# Altium PCB E-27 Line Sensor.PcbDoc
Units mil, origin at the board's own origin, x right, y up, seen from the top; angles counter-clockwise.
Board outline 1704 x 1704 mil, 2 copper layers (Top Layer, Bottom Layer); 18 components, 15 nets, 72 pads, 9 vias.
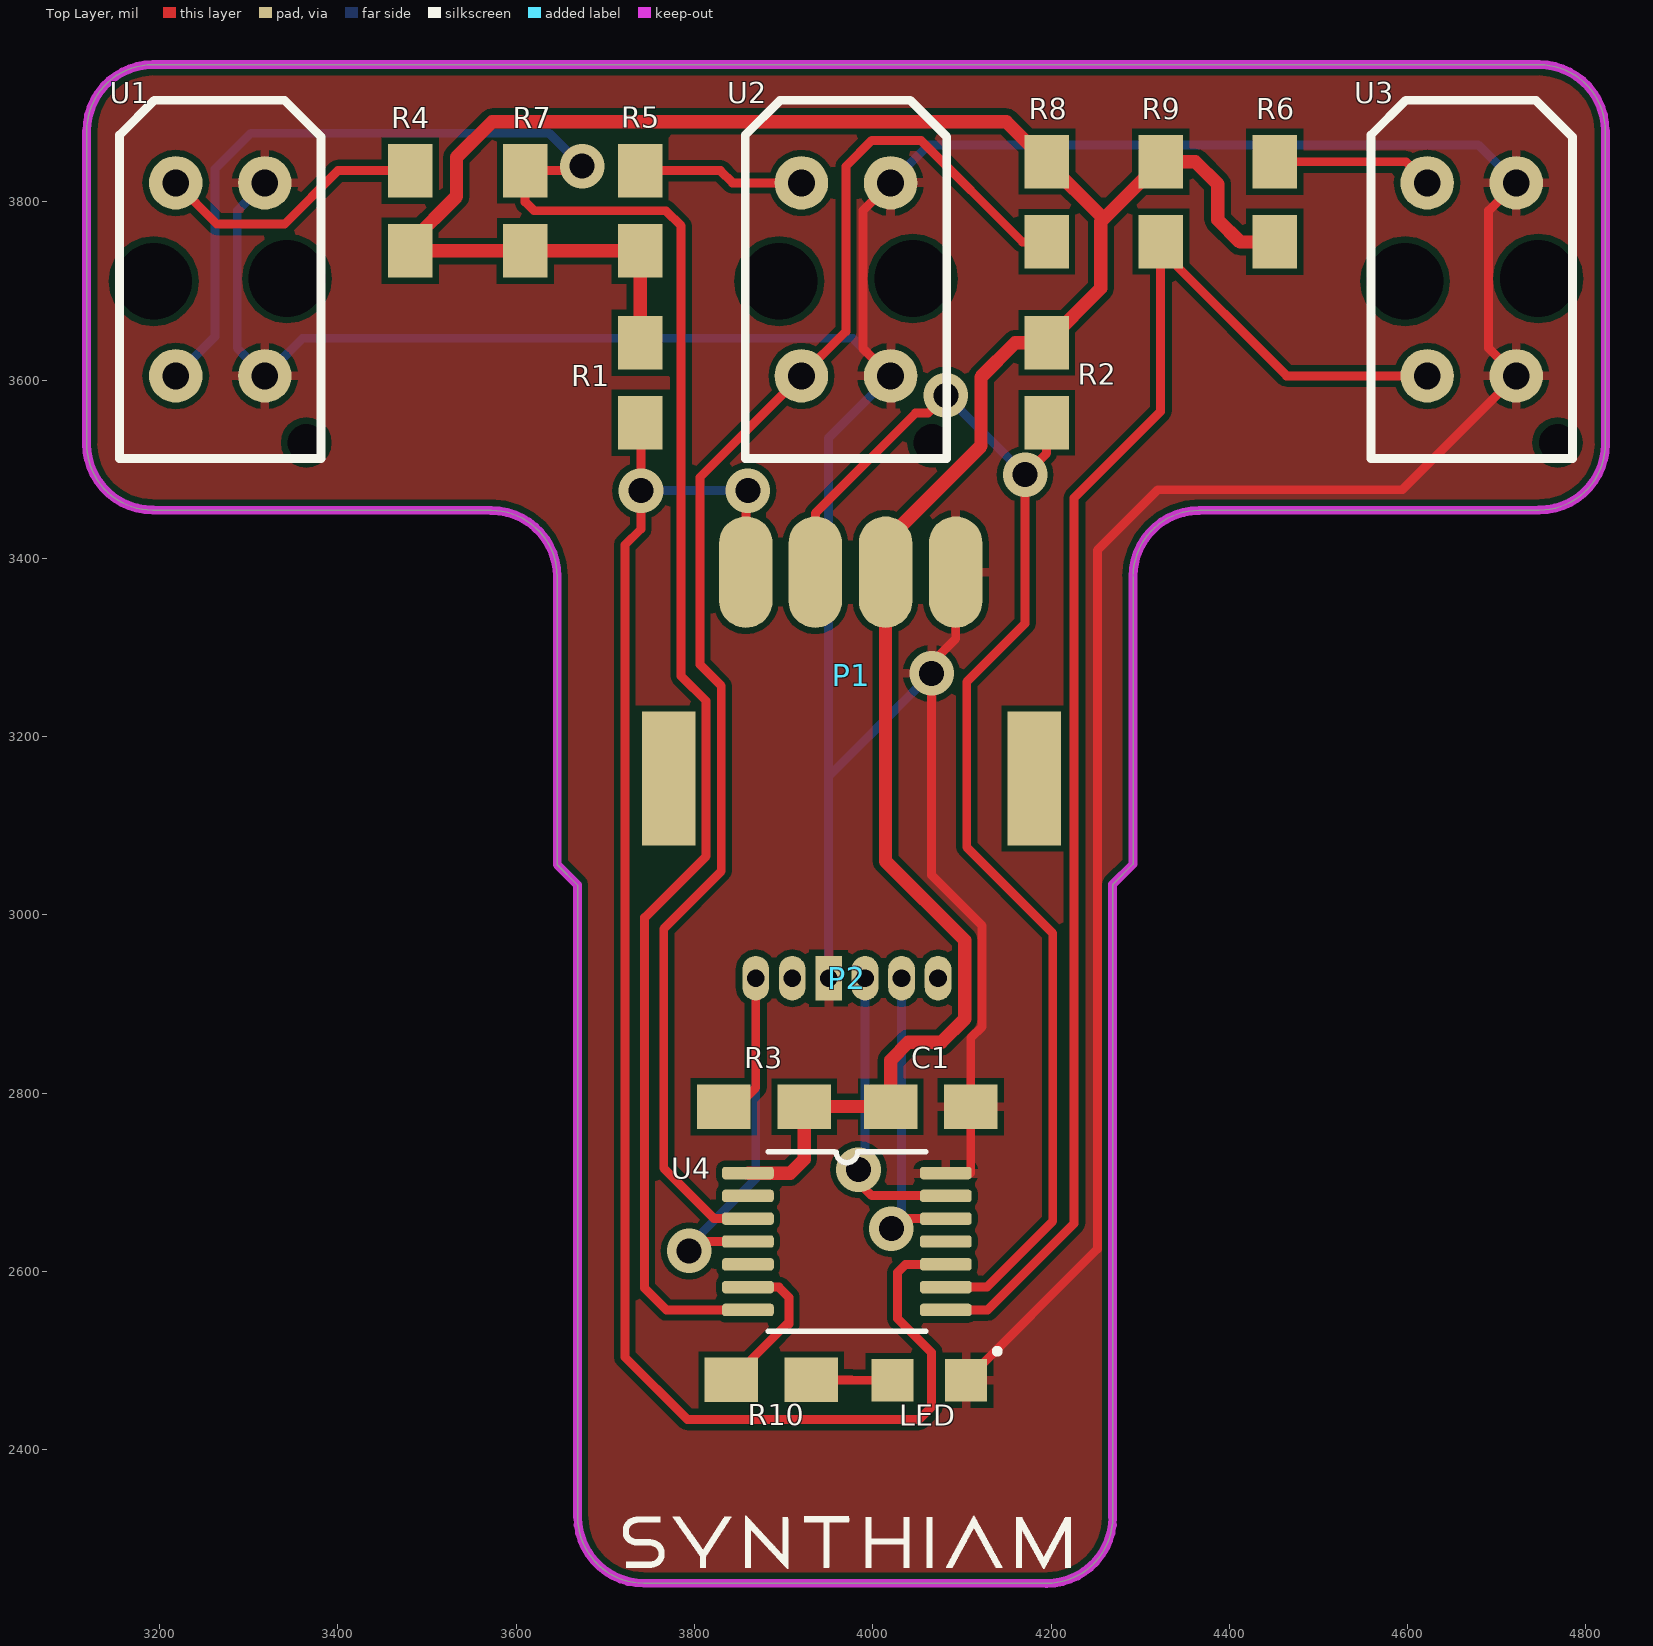
[diagram p0: Top Layer view]
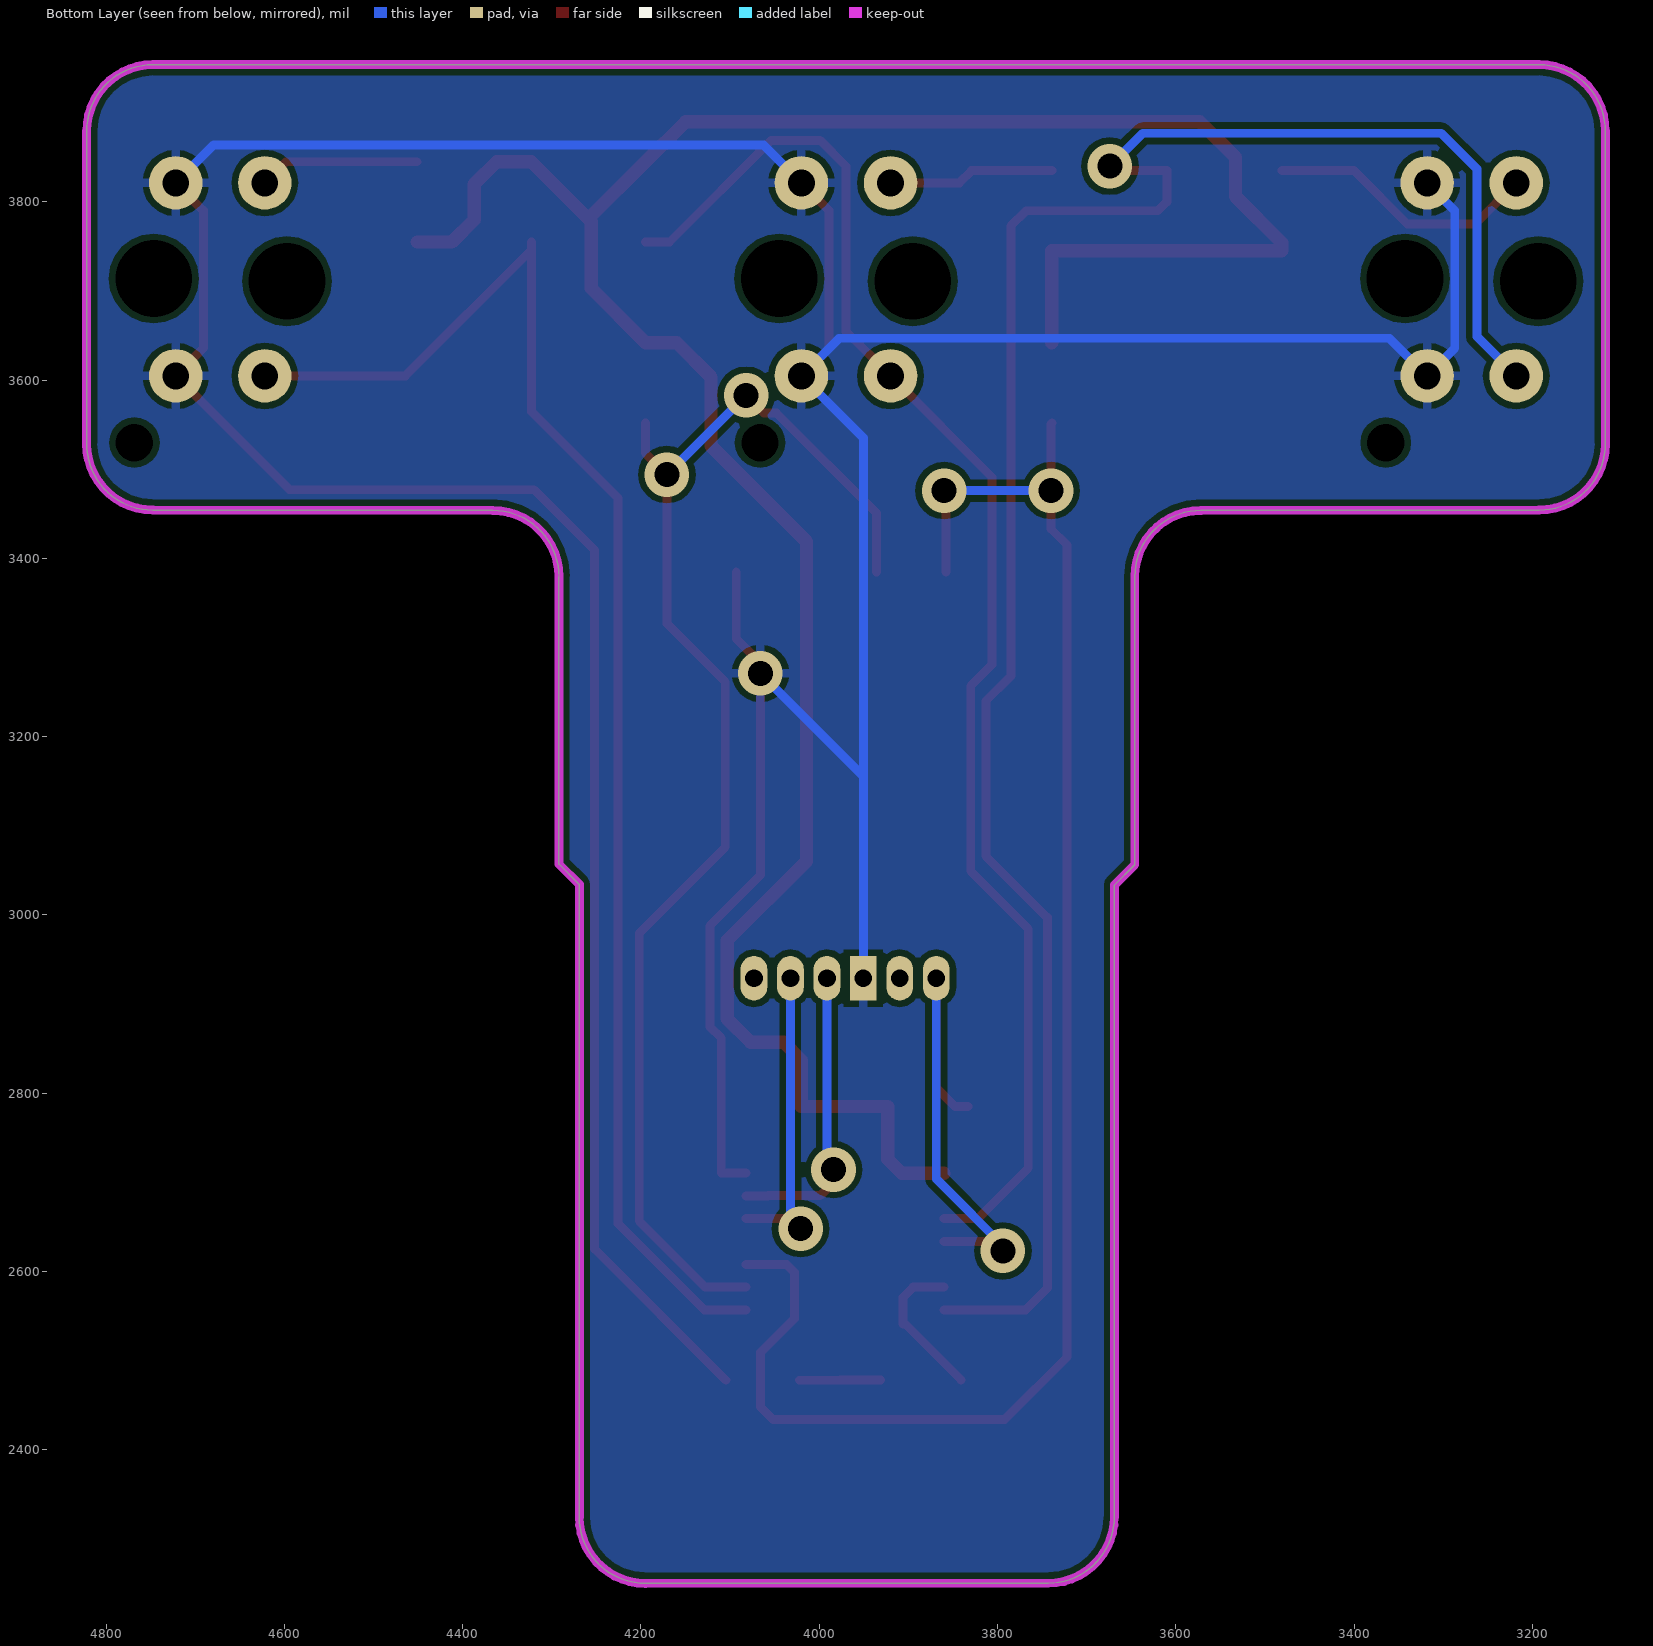
[diagram p1: Bottom Layer view, seen from below]

## Layer stack, top to bottom
Top Layer: signal copper 1.4
Dielectric: dielectric 12.6, FR-4, Dk 4.8
Bottom Layer: signal copper 1.4

## Board outline
3646,3056.31 3646,3379.5 ccw(c3571.69,3379.5) 3571.69,3453.81 3571.69,3454 3192.31,3454 3192.31,3454.19 cw(c3192.31,3528.5) 3118,3528.5 3118,3879.69 3118.19,3879.69 cw(c3192.5,3879.69) 3192.5,3954 4747.5,3954 cw(c4747.5,3879.69) 4821.81,3879.69 4822,3879.69 4822,3528.5 cw(c4747.69,3528.5) 4747.69,3454.19 4747.69,3454 4366.31,3454 4366.31,3453.81 ccw(c4366.31,3379.5) 4292,3379.5 4292,3057 4269.19,3034.19 4269.19,2324.31 4269.31,2324.31 cw(c4195,2324.31) 4195,2250 4195,2250.19 3743.31,2250.19 cw(c3743.31,2324.5) 3669,2324.5 3668.81,2324.5 3668.81,3033.5

## Design rules (kind name [scope] priority, off if disabled: settings)
Clearance [All] p1: gap=7
PolygonConnect [All] p1: connectstyle=Relief reliefconductorwidth=10 reliefentries=4 polygonreliefangle="90 Angle"
RoutingVias [All] p1: holewidth=28 width=50 viastyle="Through Hole" minholewidth=28 minwidth=50 maxholewidth=28 maxwidth=50
SMDNeckDown [All] p1: percent=110.000
SilkscreenOverComponentPads [All] p1: minsilkscreentomaskgap=10
SolderMaskExpansion [All] p1: expansion=4
Width Width_1 [InNet('VCC')] p1: maxlimit=20 minlimit=10 preferedwidth=15 minimp=50.000000 maximp=50.000000 favimp=50.000000
Width [All] p2: maxlimit=10 minlimit=10 preferedwidth=10
27 further rules are at their usual default settings.

## Components (designator, comment, footprint, x,y, rotation, side; value= is the part's Value field where it differs from the comment)
C1 "0.1uF" "0805 TIGHT" 4065,2785 r180 top
LED "LED2" "0805 LED - TIGHT" 4091,2477.95 r0 top (schematic designator PWRLED)
P1 "I2C Port" "JST-PH 4-pin SMD" 3975,3383 r180 top
P2 "Program Port" "Mini Prog header" 3971.5,2929 r0 top
R1 "10kohm" "0805 TIGHT" 3739,3597 r270 top
R2 "10kohm" "0805 TIGHT" 4195,3597 r270 top
R3 "Res1" "0805 TIGHT" 3878,2785 r0 top
R4 "10kohm" "0805 TIGHT" 3481,3790 r270 top
R5 "10kohm" "0805 TIGHT" 3739,3790 r90 top
R6 "10kohm" "0805 TIGHT" 4451,3800 r270 top
R7 "10kohm" "0805 TIGHT" 3610,3790 r90 top
R8 "10kohm" "0805 TIGHT" 4195,3800 r270 top
R9 "10kohm" "0805 TIGHT" 4323,3800 r270 top
R10 "Res1" "0805 TIGHT" 3886,2478.38 r180 top
U1 "Reflective Sensor" TCRT5000 3268,3713 r90 top
U2 "Reflective Sensor" TCRT5000 3970,3713 r90 top
U3 "Reflective Sensor" TCRT5000 4672,3713 r90 top
U4 "PIC16F1704-I/ST" TSSOP14 3971.87,2632 r0 top

## Footprints (in the part's own frame and the unit in brackets; to place one, negate y for a bottom-side part, rotate by r counter-clockwise, add the part's x,y. Pads: shape width x height; smd on the part's side, far side on the other; paste and mask are expansions set on the pad)
"0805 LED - TIGHT" [mm] "SMT LED; 2 Flat Leads; Lite-Oon LTST-C170CKT"
  rect 1.2x1.2 smd: 1(-1.75,0) 2(0.35,0)
  silkscreen extent 1.21,0.8 1.26,0.85
"0805 TIGHT" [mil]
  rect 60x50 smd: 1(-45,0) 2(45,0)
"JST-PH 4-pin SMD" [mil]
  rect 60x150 smd: 0(-206,230) 0(204,230)
  oval 60x125 smd: 1(-118.11,-1.64) 2(-39.37,-1.64) 3(39.37,-1.64) 4(117.32,-1.64)
"Mini Prog header" [mil]
  oval 30x50 hole 20: 1(-102.74,0) 2(-61.84,0) 4(19.95,0) 5(60.84,0) 6(101.74,0)
  rect 30x50 hole 20: 3(-20.95,0)
TCRT5000 [mil]
  round 0 hole 42 unplated: 0(-183.07,-96.46)
  round 0 hole 86 unplated: 0(-2,74.8) 0(1,-74.8)
  round 60 hole 30: 1(108.27,50) 2(108.27,-50) 3(-108.27,-50) 4(-108.27,50)
  silkscreen extent -201,-113 201,113
TSSOP14 [mil] "PIC16F1503"
  rrect50% 58x14 smd mask+4: 1(-111.87,78.35) 2(-111.87,52.76) 3(-111.87,27.17) 4(-111.87,1.57) 5(-111.87,-24.02) 6(-111.87,-49.61) 7(-111.87,-75.2) 8(110.13,-75.2) 9(110.13,-49.61) 10(110.13,-24.02) 11(110.13,1.57) 12(110.13,27.17) 13(110.13,52.76) 14(110.13,78.35)
  silkscreen extent -89,-99 88,102

## Part data
C1: library part Cap, "Capacitor"
LED: library part LED1, "Typical RED GaAs LED"
P1: library part "Header 4", "Header, 4-Pin"
P2: library part "Header 6", "Header, 6-Pin"
R1 R2 R4 R5 R6 R7 R8 R9: library part Res1, "Resistor"
R3 R10: "Resistor"
U1 U2 U3: library part Optoisolator1, "4-Pin Phototransistor Optocoupler"
U4: library part PIC16F1503

## Free pads (board coordinates)
  round 225 on Bottom Solder: 0(3971,2491)

## Via types
v1: diameter 50, hole 28, Top Layer to Bottom Layer, tented both sides, 9 vias

## Nets (pads, with @x,y where several pads share a name; then routed paths per layer and width w, separated by ;. In a path a pad name is that pad's centre, name@x,y a point inside that pad or via, vN(x,y) a via of type N, cw(c..) or ccw(c..) an arc to the next point about the centre after c; other vN are vias at no path point)
GND: C1.1 LED.2 P1.1 P2.3 U1.2 U1.3 U2.2 U2.3 U3.2 U3.3 U4.14 | length 5366.3
  Top Layer w10: U2.3 3989,3635.73 3989,3790.27 U2.2 ; v1(4066,3271) 4066,3283 v1@4066.05,3282.95 ; U4.14 4110,2710.35 C1.1 4110,2862 4122.77,2874.77 4122.77,2987.84 4066.05,3044.55 v1@4066.05,3282.95 ; P1.1 4093.11,3310 v1@4066.05,3282.95 ; LED.2 4252,2625.17 4252,3409 4320,3477 4594.27,3477 U3.3 4691,3635.73 4691,3790.27 U3.2
  Bottom Layer w10: U1.2 3287,3790.27 3287,3635.73 U1.3 3360.27,3647 3977.73,3647 U2.3 3950.55,3535.28 P2.3 ; 3950.55,3155.55 v1(4066,3271) ; U2.2 4062.73,3864 4679.27,3864 U3.2
LED: R10.2 U4.6 | length 171.7
  Top Layer w10: R10.2 3903.62,2541 3906,2541 3906,2571 3894.61,2582.39 U4.6
NetPWRLED_1: LED.1 R10.1 | length 91.3
  Top Layer w10: R10.1 3976,2478.38 3976.43,2477.95 LED.1
NetR4_1: R4.1 U1.1 | length 307
  Top Layer w10: U1.1 3264.27,3775 3340,3775 3400,3835 R4.1
NetR5_2: R5.2 U2.1 | length 186.7
  Top Layer w10: R5.2 3829,3835 3842.73,3821.27 U2.1
NetR6_1: R6.1 U3.1 | length 180.8
  Top Layer w10: R6.1 4598.27,3845 U3.1
PGC: P2.5 U4.12 | length 351.3
  Top Layer w10: v1(4021,2648) 4032.17,2659.17 U4.12
  Bottom Layer w10: v1(4021,2648) 4032.34,2659.34 P2.5
PGD: P2.4 U4.13 | length 336.4
  Top Layer w10: v1(3984,2714.31) 3984,2700 3999,2685 4057.76,2685 4058,2684.76 U4.13
  Bottom Layer w10: v1(3984,2714.31) 3991.45,2721.76 P2.4
RST: P2.1 R3.1 U4.4 | length 615.4
  Top Layer w10: v1(3794,2623) 3794,2613 3814.57,2633.57 U4.4 ; R3.1 3847.5,2785 3868.76,2806.26 P2.1
  Bottom Layer w10: v1(3794,2623) 3794,2613 3786,2621 3868.76,2703.76 P2.1
S0: R7.2 U1.4 U4.7 | length 2339.5
  Top Layer w10: v1(3674,3840) 3669,3835 R7.2 3610,3800 3620,3790 3768,3790 3785,3773 3785,3268 3813,3240 3813,3066 3744,2997 3744,2581.29 3768.49,2556.8 U4.7
  Bottom Layer w10: U1.4 3262,3648.73 3262,3836.66 3302.34,3877 3637,3877 v1(3674,3840)
S1: R8.2 U2.4 U4.3 | length 1631
  Top Layer w10: U4.3 3822.09,2659.17 3765.5,2715.76 3765.5,2984.5 3830,3049 3830,3257 3806,3281 3806,3490.73 U2.4 3970,3654.73 3970,3840 3999,3869 4054,3869 4168,3755 R8.2
S2: R9.2 U3.4 U4.8 | length 1692
  Top Layer w10: U4.8 4128.8,2556.8 4226,2654 4226,3468 4323,3565 R9.2 4323,3746 4464.27,3604.73 U3.4
SCL: P1.4 R1.2 U4.10 | length 1885.6
  Top Layer w10: R1.2 3740,3551 v1(3740,3476) 3740,3433 3722,3415 3722,2504 3792,2434 4052,2434 4066,2448 4066,2509 4028,2547 4028,2599 4036.98,2607.98 U4.10 ; P1.4 3857.68,3473.68 v1(3860,3476)
  Bottom Layer w10: v1(3740,3476) v1(3860,3476) v1@3870,3486
SDA: P1.3 R2.2 U4.9 | length 1516.3
  Top Layer w10: P1.3 3935.63,3450.63 4048,3563 4062,3563 v1(4082,3583) ; U4.9 4128,2582.39 4202,2656.39 4202,2979.45 4105.51,3075.93 4105.51,3261.51 4171,3327 v1(4171,3494) 4195,3518 R2.2
  Bottom Layer w10: v1(4082,3583) v1(4171,3494)
VCC: C1.2 P1.2 R1.1 R2.1 R3.2 R4.2 R5.1 R6.2 R7.1 R8.1 R9.1 U4.1 | length 2986.6
  Top Layer w15: R1.1 R5.1 R7.1 R4.2 3481,3754 3533,3806 3533,3850 3573,3890 4150,3890 R8.1 4259,3781 R9.1 4362,3845 4387,3820 4387,3780 4412,3755 R6.2 ; U4.1 3907.35,2710.35 3923,2726 R3.2 C1.2 4020,2837 4040,2857 4077.09,2857 4103.27,2883.18 4103.27,2971.41 4014.37,3060.31 P1.2 4014.37,3419 4121.5,3526.13 4121.5,3603.5 4160,3642 R2.1 4256,3703 4256,3778
pads on no net: P1.0 P2.2 P2.6 U1.0 U2.0 U3.0 U4.2 U4.5 U4.11

## Polygon pours and split planes (outlines as drawn)
GND on Top Layer "TLpour" (solid): 3646,3056.31 3646,3379.5 ccw(c3571.69,3379.5) 3571.69,3453.81 3571.69,3454 3192.31,3454 3192.31,3454.19 cw(c3192.31,3528.5) 3118,3528.5 3118,3879.69 3118.19,3879.69 cw(c3192.5,3879.69) 3192.5,3954 4747.5,3954 cw(c4747.5,3879.69) 4821.81,3879.69 4822,3879.69 4822,3528.5 cw(c4747.69,3528.5) 4747.69,3454.19 4747.69,3454 4366.31,3454 4366.31,3453.81 ccw(c4366.31,3379.5) 4292,3379.5 4292,3057 4269.19,3034.19 4269.19,2324.31 4269.31,2324.31 cw(c4195,2324.31) 4195,2250 4195,2250.19 3743.31,2250.19 cw(c3743.31,2324.5) 3669,2324.5 3668.81,2324.5 3668.81,3033.5
GND on Bottom Layer "BLpour" (solid, pour order 5): 3646,3054.31 3646,3377.5 ccw(c3571.69,3377.5) 3571.69,3451.81 3571.69,3452 3192.31,3452 3192.31,3452.19 cw(c3192.31,3526.5) 3118,3526.5 3118,3877.69 3118.19,3877.69 cw(c3192.5,3877.69) 3192.5,3952 4747.5,3952 cw(c4747.5,3877.69) 4821.81,3877.69 4822,3877.69 4822,3526.5 cw(c4747.69,3526.5) 4747.69,3452.19 4747.69,3452 4366.31,3452 4366.31,3451.81 ccw(c4366.31,3377.5) 4292,3377.5 4292,3055 4269.19,3032.19 4269.19,2322.31 4269.31,2322.31 cw(c4195,2322.31) 4195,2248 4195,2248.19 3743.31,2248.19 cw(c3743.31,2322.5) 3669,2322.5 3668.81,2322.5 3668.81,3031.5

## Keep-outs
Keep-Out Layer:
  lines w10: 3118,3879.69 3118,3528.5 ccw(c3192.31,3528.5) 3192.31,3454.19 ; 3118.19,3879.69 cw(c3192.5,3879.69) 3192.5,3954 4747.5,3954 cw(c4747.5,3879.69) 4821.81,3879.69 ; 3192.31,3454 3571.69,3454 ; 3571.69,3453.81 cw(c3571.69,3379.5) 3646,3379.5 3646,3056.31 3668.81,3033.5 3668.81,2324.5 ; 3669,2324.5 ccw(c3743.31,2324.5) 3743.31,2250.19 4195,2250.19 ; 4195,2250 ccw(c4195,2324.31) 4269.31,2324.31 ; 4269.19,2324.31 4269.19,3034.19 4292,3057 4292,3379.5 cw(c4366.31,3379.5) 4366.31,3453.81 ; 4366.31,3454 4747.69,3454 ; 4747.69,3454.19 ccw(c4747.69,3528.5) 4822,3528.5 4822,3879.69

## Silkscreen, mask and mechanical layers (free items; w line width, h text height)
Top Overlay:
  drawing of 2260 lines, arcs and shapes, not listed
Bottom Solder:
  text ":)" at 3942,3092 h150 r270